# Altium PCB 调制板PCB.PcbDoc
Units mil, origin at the board's own origin, x right, y up, seen from the top; angles counter-clockwise.
Board outline 6000 x 4000 mil, 2 copper layers (Top Layer, Bottom Layer); 32 components, 31 nets, 166 pads, 16 vias.
Unrouted connection lines stored in the file: 2.
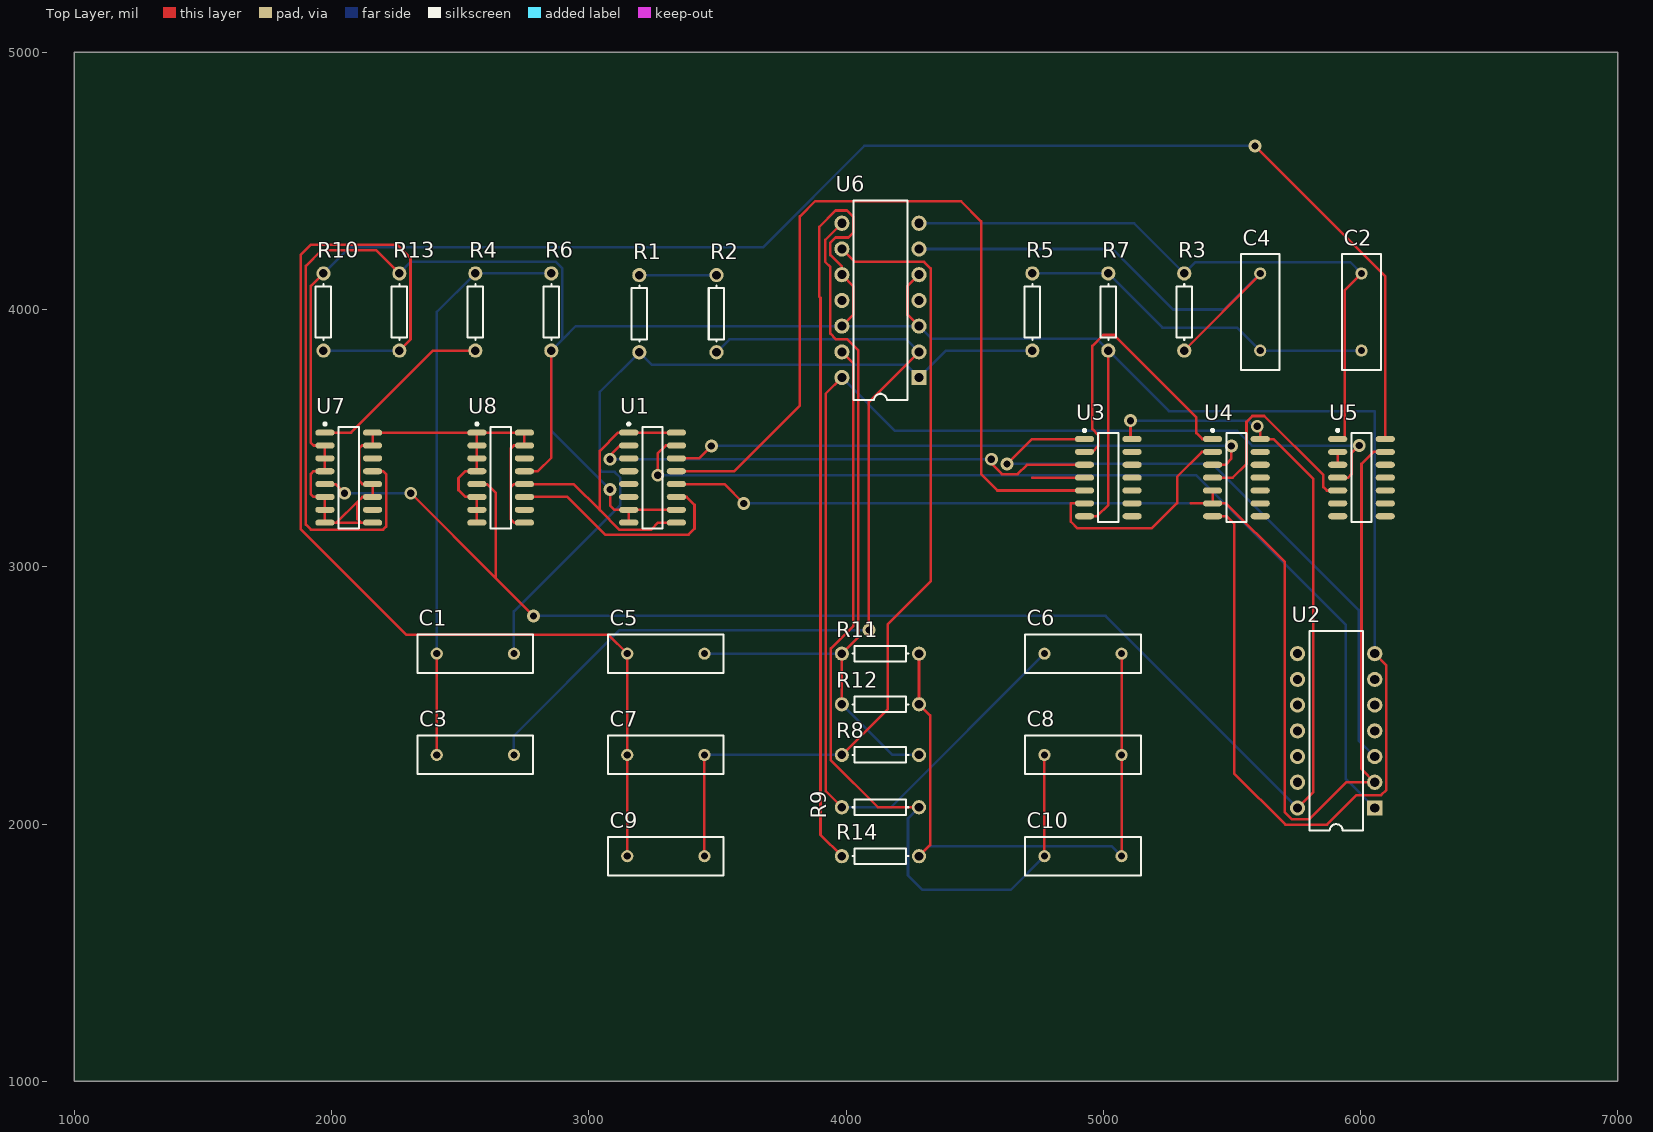
[diagram p0: Top Layer view]
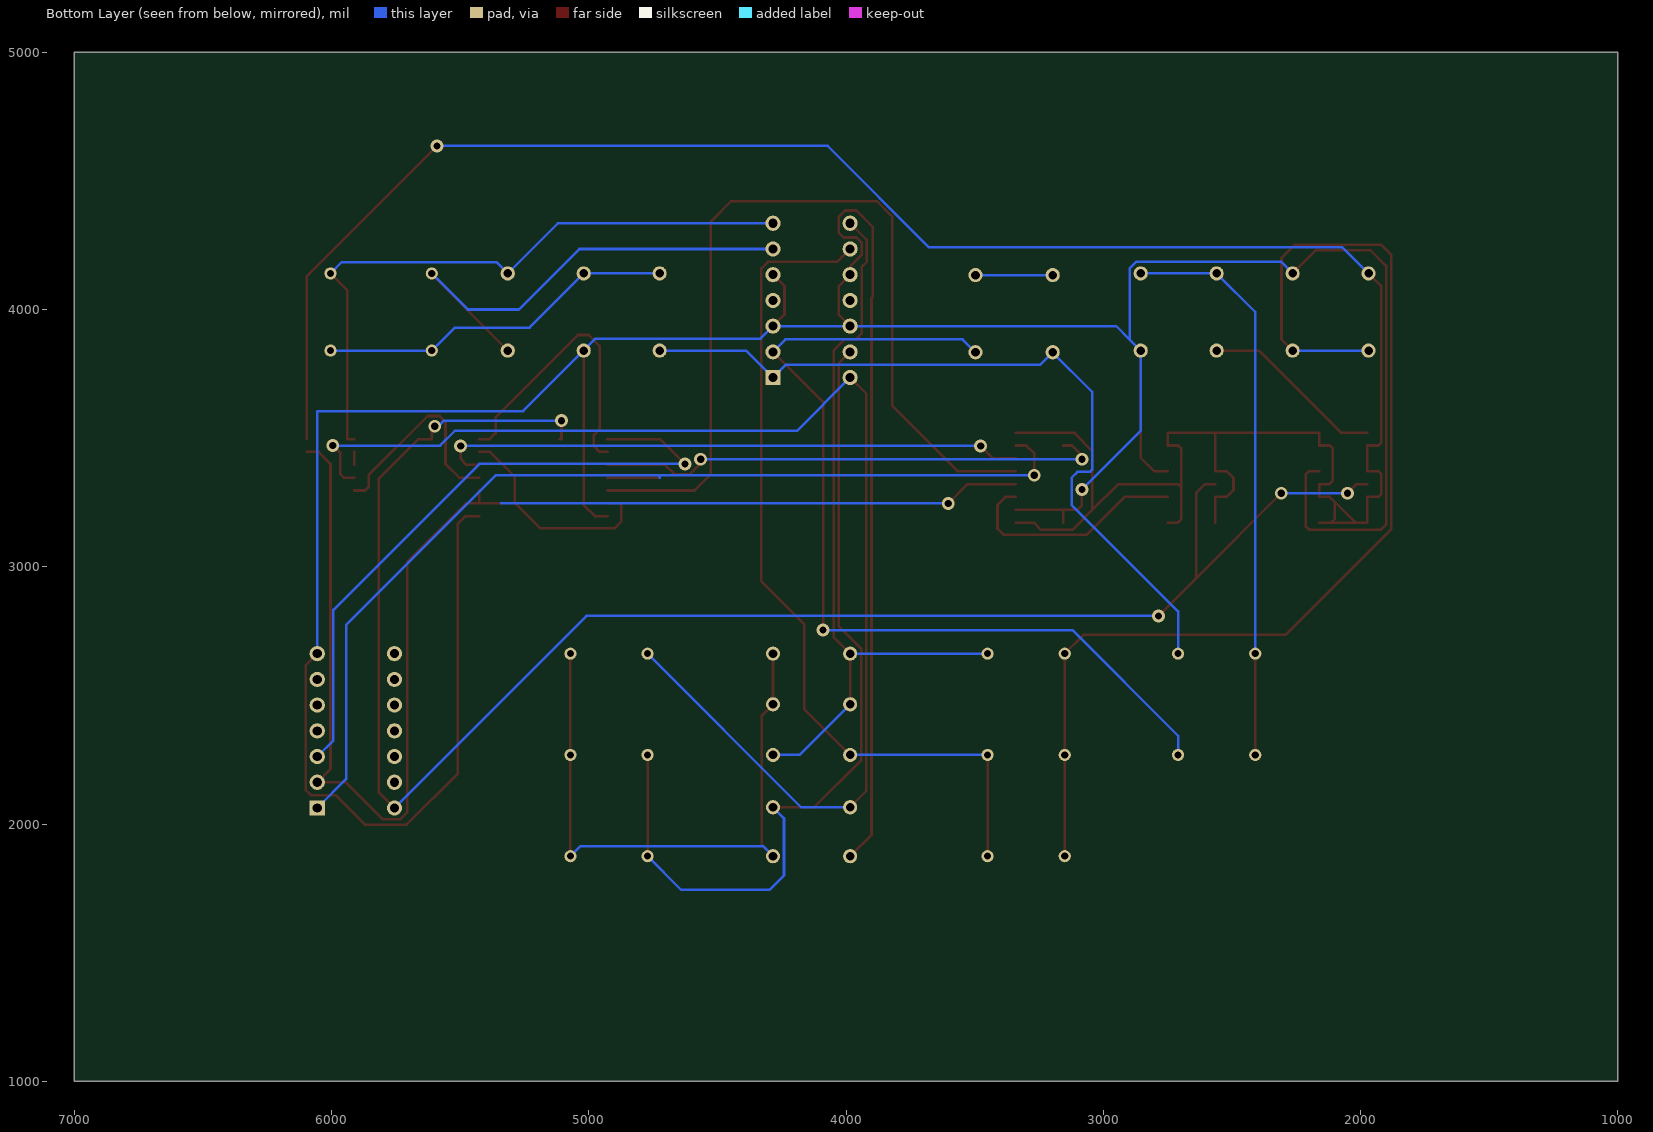
[diagram p1: Bottom Layer view, seen from below]

## Layer stack, top to bottom
Top Solder: solder mask 0.4, Solder Resist, Dk 3.5
Top Layer: signal copper 1.4
Dielectric 1: dielectric 12.6, FR-4, Dk 4.8
Bottom Layer: signal copper 1.4
Bottom Solder: solder mask 0.4, Solder Resist, Dk 3.5

## Board outline
1000,1000 7000,1000 7000,5000 1000,5000

## Design rules (kind name [scope] priority, off if disabled: settings)
Clearance [All] p1: gap=10 ignorepadtopadclearanceinfootprint=FALSE except(0: Arc-Hole Track-Hole SMDPad-Hole THPad-Hole Via-Hole Fill-Hole Poly-Hole Region-Hole Text-Hole)
PolygonConnect [All] p1: connectstyle=Relief reliefconductorwidth=10 reliefentries=4 polygonreliefangle="90 Angle" airgapwidth=10
RoomDefinition 调制板 [InComponentClass('调制板原理图')] p1: confinementstyle=ConfineIn formatcopy=TRUE outline 901.38,5019.69 7086.61,5019.69 7086.61,984.25 901.38,984.25
RoutingVias [All] p1: holewidth=28 width=50 viastyle="Through Hole" minholewidth=28 minwidth=50 maxholewidth=28 maxwidth=50
SolderMaskExpansion [All] p1: expansion=4
Width [All] p1: maxlimit=10 minlimit=10 preferedwidth=10
30 further rules are at their usual default settings.

## Components (designator, comment, footprint, x,y, rotation, side; value= is the part's Value field where it differs from the comment)
C1 "Cap" RAD-0.3 2559.06,2662.21 r0 top value=100pF
C2 "Cap" RAD-0.3 6003.94,3990.39 r90 top value=100pF
C3 "Cap" RAD-0.3 2559.06,2268.51 r0 top value=100pF
C4 "Cap" RAD-0.3 5610.24,3990.39 r90 top value=100pF
C5 "Cap" RAD-0.3 3299.61,2662.21 r0 top value=150p
C6 "Cap" RAD-0.3 4921.26,2662.21 r180 top value=150p
C7 "Cap" RAD-0.3 3299.61,2268.51 r0 top value=20p
C8 "Cap" RAD-0.3 4921.26,2268.51 r180 top value=100pF
C9 "Cap" RAD-0.3 3299.61,1874.81 r0 top value=100pF
C10 "Cap" RAD-0.3 4921.26,1874.81 r180 top value=100pF
R1 "Res1" AXIAL-0.3 3196.46,3983.86 r270 top value=100k
R2 "Res1" AXIAL-0.3 3496.46,3983.86 r90 top value=15k
R3 "Res1" AXIAL-0.3 5314.96,3990.39 r90 top value=91k
R4 "Res1" AXIAL-0.3 2559.06,3990.39 r90 top value=15k
R5 "Res1" AXIAL-0.3 4724.41,3990.39 r90 top value=47k
R6 "Res1" AXIAL-0.3 2854.33,3990.39 r90 top value=1.5k
R7 "Res1" AXIAL-0.3 5019.69,3990.39 r90 top value=1.2k
R8 "Res1" AXIAL-0.3 4133.86,2268.51 r0 top value=120k
R9 "Res1" AXIAL-0.3 4133.86,2065.12 r180 top value=82k
R10 "Res1" AXIAL-0.3 1968.5,3990.39 r270 top value=12k
R11 "Res1" AXIAL-0.3 4133.86,2662.21 r0 top value=100k
R12 "Res1" AXIAL-0.3 4133.86,2465.36 r0 top value=100k
R13 "Res1" AXIAL-0.3 2263.78,3990.39 r270 top value=5.1k
R14 "Res1" AXIAL-0.3 4133.86,1874.81 r0 top value=3k
U1 "SN74LS194AD" D016_L 3248.03,3346.46 r0 top
U2 "SN74LS86AN" N014 5905.51,2362.21 r90 top
U3 "SN74LS32D" D014_L 5019.69,3346.46 r0 top
U4 "SN74LS02D" D014_L 5517.72,3346.46 r0 top
U5 "TLC4066ID" D014_L 6003.94,3346.46 r0 top
U6 "TL084N" N014 4133.86,4035.43 r90 top
U7 "SN74LS76AD" D016_L 2066.93,3346.46 r0 top
U8 "SN74LS76AD" D016_L 2657.48,3346.46 r0 top

## Footprints (in the part's own frame and the unit in brackets; to place one, negate y for a bottom-side part, rotate by r counter-clockwise, add the part's x,y. Pads: shape width x height; smd on the part's side, far side on the other; paste and mask are expansions set on the pad)
AXIAL-0.3 [mm] "Axial Device, Thru-Hole; 2 Leads; 0.3 in Pin Spacing"
  round 1.4 hole 0.85: 1(-3.81,0) 2(3.81,0)
  silkscreen extent -2.77,-0.76 2.77,0.76
D014_L [mm] "SOIC, 14-Leads, Body 8.7x3.9mm, Pitch 1.27mm, IPC High Density"
  oval 1.9x0.6 smd: 1(-2.35,3.81) 2(-2.35,2.54) 3(-2.35,1.27) 4(-2.35,0) 5(-2.35,-1.27) 6(-2.35,-2.54) 7(-2.35,-3.81) 8(2.35,-3.81) 9(2.35,-2.54) 10(2.35,-1.27) 11(2.35,0) 12(2.35,1.27) 13(2.35,2.54) 14(2.35,3.81)
  silkscreen extent -2.47,-4.4 1,4.78, body extent -1.95,-4.33 1.95,4.33, height 1.75
D016_L [mm] "SOIC, 16-Leads, Body 9.9x3.9mm, Pitch 1.27mm, IPC High Density"
  oval 1.9x0.6 smd: 1(-2.35,4.445) 2(-2.35,3.175) 3(-2.35,1.905) 4(-2.35,0.635) 5(-2.35,-0.635) 6(-2.35,-1.905) 7(-2.35,-3.175) 8(-2.35,-4.445) 9(2.35,-4.445) 10(2.35,-3.175) 11(2.35,-1.905) 12(2.35,-0.635) 13(2.35,0.635) 14(2.35,1.905) 15(2.35,3.175) 16(2.35,4.445)
  silkscreen extent -2.47,-5 1,5.42, body extent -1.95,-4.95 1.95,4.95, height 1.75
N014 [mm] "DIP; 14 Leads; Row Spacing 7.62 mm; Pitch 2.54 mm"
  rect 1.5x1.5 hole 0.9: 1(-7.62,-3.81)
  round 1.5 hole 0.9: 2(-5.08,-3.81) 3(-2.54,-3.81) 4(0,-3.81) 5(2.54,-3.81) 6(5.08,-3.81) 7(7.62,-3.81) 8(7.62,3.81) 9(5.08,3.81) 10(2.54,3.81) 11(0,3.81) 12(-2.54,3.81) 13(-5.08,3.81) 14(-7.62,3.81)
  silkscreen extent -9.85,-2.65 9.85,2.65
RAD-0.3 [mm] "Radial Cap, Thru-Hole; 2 Leads; 0.3 in Pin Spacing"
  round 1.2 hole 0.7: 1(-3.81,0) 2(3.81,0)
  silkscreen extent -5.71,-1.9 5.72,1.91

## Part data
C1 C2 C3 C4 C5 C6 C7 C8 C9 C10: "Capacitor", LatestRevisionDate=17-Jul-2002, LatestRevisionNote="Re-released for DXP Platform.", PackageDescription="Radial Cap, Thru-Hole; 2 Leads; 0.3 in Pin Spacing", PackageReference=RAD-0.3, Published=8-Jun-2000, Publisher="Altium Limited"
R1 R2 R3 R4 R5 R6 R7 R8 R9 R10 R11 R12 R13 R14: "Resistor", LatestRevisionDate=17-Jul-2002, LatestRevisionNote="Re-released for DXP Platform.", PackageDescription="Axial Device, Thru-Hole; 2 Leads; 0.3 in Pin Spacing", PackageReference=AXIAL-0.3, Published=8-Jun-2000, Publisher="Altium Limited"
U1: "4-Bit Bidirectional Universal Shift Register", Code_IPC=SOIC127P600-16, ComponentLink1Description="Manufacturer Link", ComponentLink1URL=http://www.ti.com/, ComponentLink2Description=Datasheet, ComponentLink2URL=http://www-s.ti.com/sc/ds/sn74ls194a.pdf, DatasheetVersion=Mar-1988, LatestRevisionDate=13-Apr-2006, LatestRevisionNote="IPC-7351 Footprint Added.", PackageDescription="16-Pin Small Outline Integrated Circuit 1.27 mm Pitch", PackageReference=D016, PackageVersion=Jan-1998, Published=8-Jun-2000, Publisher="Altium Limited"
U2: "Quadruple 2-Input Exclusive-OR Gate", ComponentLink1Description="Manufacturer Link", ComponentLink1URL=http://www.ti.com/, ComponentLink2Description=Datasheet, ComponentLink2URL=http://www-s.ti.com/sc/ds/sn74ls86a.pdf, DatasheetVersion=Mar-1988, LatestRevisionDate=04-Mar-2005, LatestRevisionNote="Stylized 3D Model Added.", PackageDescription="DIP; 14 Leads; Row Spacing 7.62 mm; Pitch 2.54 mm", PackageReference=N014, PackageVersion=Oct-1995, Published=8-Jun-2000, Publisher="Altium Limited"
U3: "Quadruple 2-Input Positive-OR Gate", Code_IPC=SOIC127P600-14, ComponentLink1Description="Manufacturer Link", ComponentLink1URL=http://www.ti.com/, ComponentLink2Description=Datasheet, ComponentLink2URL=http://www-s.ti.com/sc/ds/sn74ls32.pdf, DatasheetVersion=Mar-1988, LatestRevisionDate=13-Apr-2006, LatestRevisionNote="IPC-7351 Footprint Added.", PackageDescription="14-Pin Small Outline Integrated Circuit 1.27 mm Pitch", PackageReference=D014, PackageVersion=Jan-1998, Published=8-Jun-2000, Publisher="Altium Limited"
U4: "Quadruple 2-Input Positive-NOR Gate", Code_IPC=SOIC127P600-14, ComponentLink1Description="Manufacturer Link", ComponentLink1URL=http://www.ti.com/, ComponentLink2Description=Datasheet, ComponentLink2URL=http://www-s.ti.com/sc/ds/sn54s02.pdf, DatasheetVersion=Mar-1988, LatestRevisionDate=13-Apr-2006, LatestRevisionNote="IPC-7351 Footprint Added.", PackageDescription="14-Pin Small Outline Integrated Circuit 1.27 mm Pitch", PackageReference=D014, PackageVersion=Jan-1998, Published=8-Jun-2000, Publisher="Altium Limited"
U5: "Quadruple Bilateral Analog Switch", Code_IPC=SOIC127P600-14, ComponentLink1Description="Manufacturer Link", ComponentLink1URL=http://www.ti.com/, DatasheetVersion=Jan-1986, LatestRevisionDate=13-Apr-2006, LatestRevisionNote="IPC-7351 Footprint Added.", PackageDescription="14-Pin Small Outline Integrated Circuit 1.27 mm Pitch", PackageReference=D014, PackageVersion=Jan-1998, Published=8-Jun-2000, Publisher="Altium Limited"
U6: "JFET-Input Operational Amplifier", ComponentLink1Description="Manufacturer Link", ComponentLink1URL=http://www.ti.com/, ComponentLink2Description=Datasheet, ComponentLink2URL=http://www-s.ti.com/sc/ds/tl084.pdf, DatasheetVersion=Feb-1999, LatestRevisionDate=04-Mar-2005, LatestRevisionNote="Stylized 3D Model Added.", PackageDescription="DIP; 14 Leads; Row Spacing 7.62 mm; Pitch 2.54 mm", PackageReference=N014, PackageVersion=Oct-1995, Published=16-Jan-2001, Publisher="Altium Limited"
U7 U8: "Dual J-K Flip-Flop with Preset and Clear", Code_IPC=SOIC127P600-16, ComponentAvailability=Obsolete, ComponentLink1Description="Manufacturer Link", ComponentLink1URL=http://www.ti.com/, ComponentLink2Description=Datasheet, ComponentLink2URL=http://www-s.ti.com/sc/ds/sn74ls76a.pdf, DatasheetVersion=Mar-1988, LatestRevisionDate=13-Apr-2006, LatestRevisionNote="IPC-7351 Footprint Added.", PackageDescription="16-Pin Small Outline Integrated Circuit 1.27 mm Pitch", PackageReference=D016, PackageVersion=Jan-1998, Published=8-Jun-2000, Publisher="Altium Limited"

## Via types
v1: diameter 50, hole 28, Top Layer to Bottom Layer, 16 vias

## Nets (pads, with @x,y where several pads share a name; then routed paths per layer and width w, separated by ;. In a path a pad name is that pad's centre, name@x,y a point inside that pad or via, vN(x,y) a via of type N, cw(c..) or ccw(c..) an arc to the next point about the centre after c; other vN are vias at no path point)
+5: R10.1 U1.1 U1.9 U1.16 U5.14 U7.2 U7.3 U7.4 U7.6 U7.7 U7.8 U7.9 U7.11 U7.12 U7.15 U7.16 U8.1 U8.2 U8.3 U8.4 U8.6 U8.7 U8.8 U8.9 U8.12 U8.15 U8.16 | length 9887.2
  Top Layer w10: R10.1 1920,4091.89 1920,3481.46 1930,3471.46 U7.2 U7.3 U7.4 1930,3371.46 1920,3361.46 1920,3281.46 1930,3271.46 U7.6 U7.7 U7.8 2020,3171.46 ; U7.9 2114,3171.46 ; U8.8 U8.7 U8.6 2520,3271.46 2493.54,3297.92 2493.54,3345 2520,3371.46 U8.4 U8.3 U8.2 U8.1 ; U8.9 2710,3171.46 2697,3184.46 2697,3310 ; U1.9 3270,3171.46 3243.19,3144.65 3118.35,3144.65 3043,3220 ; U1.16 U1.1 3114.46,3521.46 3043,3450 3043,3220 ; v1(5590,4636) 6096,4130 6096,3496.46 U5.14 ; 2020,3171.46 2114,3171.46 ; 2020,3171.46 2100,3251.46 ; 2100,3251.46 2100,3185.46 2114,3171.46 ; 2100,3251.46 2120,3271.46 U7.11 U7.12 2120,3321.46 2107,3334.46 2107,3460 2118.46,3471.46 U7.15 U7.16 U8.1 ; U8.1 U8.16 U8.15 2708.46,3471.46 2697,3460 2697,3310 ; 2697,3310 2708.46,3321.46 U8.12 2941.54,3321.46 3043,3220
  Bottom Layer w10: R10.1 2070.11,4242 3677,4242 4071,4636 v1(5590,4636)
+12: U6.11
-5: U5.7
-12: U6.4
GND: R6.1 R7.1 R13.1 R14.1 U1.7 U1.8 U1.10 U2.7 U3.7 U4.7 U6.3 U6.5 U6.10 U6.12 U7.13 U8.13 | length 15324.1
  Top Layer w10: U7.13 2200.54,3371.46 2212,3360 2212,3156 2200,3144 1920,3144 1900,3164 1900,4170 1960,4230 2174.18,4230 R13.1 ; U8.13 2802,3371.46 2854.33,3423.79 R6.1 ; v1(3083,3300) 3083,3238.46 3100,3221.46 U1.7 ; U1.8 U1.7 ; U1.10 U1.7 ; R14.1 3901,1957.67 3901,4045 3896,4050 3896,4321 3960,4385 4004,4385 4029,4360 4029,4300 4009,4280 3959.33,4280 3939.33,4260 3939.33,4211.67 3983.86,4167.14 U6.10 4029,4090.29 4029,3980.58 U6.12 ; U6.3 4239,3980.29 4239,4090.58 U6.5 ; U3.7 4976.14,3196.46 5019.69,3240 R7.1 ; U4.7 5480,3196.46 5509,3167.46 5509,2196.84 5708.16,1997.68 5870.68,1997.68 5985,2112 6080,2112 6101,2133 6101,2616.72 U2.7
  Bottom Layer w10: R13.1 2309.39,4186 2871,4186 2897,4160 2897,3883.06 ; v1(3083,3300) 2854.33,3528.67 R6.1 2897,3883.06 ; U2.7 6055.51,3604.49 6055,3605 5255.08,3605 R7.1 4973.08,3887 4332.29,3887 U6.3 U6.12 2949.37,3935.43 2897,3883.06
NetC1_1: C1.1 C3.1 R4.2 R6.2 | length 2229.3
  Top Layer w10: C3.1 2409.06,2465 C1.1
  Bottom Layer w10: C1.1 2409.06,3990.4 R4.2 R6.2
NetC1_2: C1.2 R1.2 R5.1 U6.1 | length 3080.1
  Bottom Layer w10: C1.2 2709.06,2826.06 3123,3240 3123,3346 3100,3369 3052,3369 3043,3378 3043,3680.4 R1.2 3245.32,3785 4234.29,3785 U6.1 4388.82,3840.39 R5.1
NetC2_1: C2.1 C4.1 R5.2 R7.2 | length 1403.8
  Bottom Layer w10: R5.2 4872,4140.39 R7.2 5230.08,3930 5520.63,3930 C4.1 C2.1
NetC2_2: C2.2 R3.2 U5.1 U6.7 | length 2535.4
  Top Layer w10: U5.1 5939,3496.46 5939,4075.46 C2.2
  Bottom Layer w10: U6.7 5119.92,4335.43 R3.2 5358.57,4184 5960.33,4184 C2.2
NetC3_2: C3.2 R2.1 U6.2 | length 3615.1
  Top Layer w10: v1(4089,2754) 4089,3640.58 U6.2
  Bottom Layer w10: C3.2 2709.06,2343.06 3120,2754 v1(4089,2754) ; R2.1 3546.6,3884 4235.29,3884 U6.2
NetC4_2: C4.2 R3.1 U6.6 | length 1904.4
  Top Layer w10: R3.1 5610.24,4135.67 C4.2
  Bottom Layer w10: U6.6 5036.57,4235.43 5272,4000 5469.84,4000 C4.2
NetC5_1: C5.1 C7.1 C9.1 R10.2 R13.2 | length 4460.7
  Top Layer w10: R13.2 2307,3883.61 2307,4200 2255,4252 1920,4252 1880,4212 1880,3147 2292,2735 3076.82,2735 C5.1 3149.61,2465 C7.1 C9.1
  Bottom Layer w10: R10.2 2116,3840.39 R13.2
NetC5_2: C5.2 R8.2 R11.1 R12.1 U6.8 | length 2918.6
  Top Layer w10: R12.1 R11.1 4048.39,2726.73 4048.39,3840.61 4004,3885 3960,3885 3939,3906 3939,4165.25 3919.33,4184.92 3919.33,4270.91 U6.8
  Bottom Layer w10: C5.2 3716,2662.21 R11.1 ; R12.1 4180.71,2268.51 R8.2
NetC6_1: C6.1 C8.1 C10.1 R11.2 R12.2 R14.2 | length 2430.4
  Top Layer w10: R14.2 4327,1917.94 4327,2422.22 R12.2 R11.2 ; C10.1 5071.26,2071 C8.1 C6.1
  Bottom Layer w10: R14.2 4323.06,1914 5032.07,1914 C10.1
NetC6_2: C6.2 R9.2 U5.4 U6.14 | length 5060.7
  Top Layer w10: R9.2 3921.3,2127.68 3921.3,3672.88 U6.14 ; U5.4 5952.46,3346.46 5966,3360 5966,3442 v1(5995,3471)
  Bottom Layer w10: R9.2 4174.18,2065.12 C6.2 ; U6.14 4191.29,3528 5521,3528 5578,3471 v1(5995,3471)
NetC7_2: C7.2 C9.2 R8.1 U6.9 | length 3338.8
  Top Layer w10: C9.2 C7.2 ; R8.1 4162.82,2447.47 4162.82,2776.82 4329,2943 4329,4160 4304,4185 4034.29,4185 U6.9
  Bottom Layer w10: C7.2 3716,2268.51 R8.1
NetC8_2: C8.2 C10.2 R9.1 U6.13 | length 3344.7
  Top Layer w10: U6.13 4028.39,3790.91 4028.39,2769.39 3941.3,2682.3 3941.3,2247.7 4123.88,2065.12 R9.1 ; C10.2 4771.26,2071 C8.2
  Bottom Layer w10: R9.1 4241,2022.26 4241,1800 4297,1744 4640.46,1744 C10.2
NetR1_1: R1.1 R2.2 | length 300
  Bottom Layer w10: R1.1 R2.2
NetR4_1: R4.1 U7.1 | length 716.8
  Top Layer w10: U7.1 2076,3521.46 2394.94,3840.39 R4.1
NetU1_2: U1.2 U3.3 | length 1996.4
  Top Layer w10: v1(3083,3418) 3083,3432.46 3122,3471.46 U1.2 ; v1(4565,3418) 4565,3401 4606,3360 4667,3360 4703.46,3396.46 U3.3
  Bottom Layer w10: v1(3083,3418) v1(4565,3418)
NetU1_11: U1.11 U8.11 | length 907.2
  Top Layer w10: U8.11 2917,3271.46 3063.81,3124.65 3387.65,3124.65 3411,3148 3411,3240.46 3380,3271.46 U1.11
NetU1_12: U1.12 U2.2 U4.5 U4.6 U5.13 | length 5305.9
  Top Layer w10: U1.12 3527.54,3321.46 v1(3602.54,3246.46) ; 5339.46,3246.46 U4.6 ; U4.5 U4.6 ; U5.13 6050.46,3446.46 6004,3400 6004,2213.72 U2.2 5944.53,2162.21 5800,2017.68 5733.3,2017.68 5705.84,2045.14 5705.84,3018.62 5478,3246.46 U4.6
  Bottom Layer w10: v1(3602.54,3246.46) 5339.46,3246.46
NetU1_13: U1.13 U3.5 | length 3493.8
  Top Layer w10: U1.13 3566,3371.46 3821,3626.46 3821,4362 3880,4421 4447,4421 4525,4343 4525,3360 4588.54,3296.46 U3.5
NetU1_14: U1.14 U4.3 | length 2310.1
  Top Layer w10: U1.14 3428,3421.46 v1(3476.54,3470) ; U4.3 5474.46,3396.46 5498,3420 v1(5498,3470)
  Bottom Layer w10: v1(3476.54,3470) v1(5498,3470)
NetU1_15: U1.15 U2.1 U3.4 | length 4056
  Top Layer w10: v1(3268,3356) 3268,3440 3299.46,3471.46 U1.15 ; 4724.81,3346.46 U3.4
  Bottom Layer w10: v1(3268,3356) 4724.81,3356 ; 4724.81,3346.46 4724.81,3356 ; U2.1 5943,2174.72 5943,2774.13 5361.13,3356 4724.81,3356
NetU2_3: U2.3 U3.1 | length 2539.1
  Top Layer w10: v1(4626,3400) 4722.46,3496.46 U3.1
  Bottom Layer w10: v1(4626,3400) 5425,3400 5993,2832 5993,2324.72 U2.3
NetU3_2: U3.2 U4.1 | length 1149.2
  Top Layer w10: U3.2 4957.46,3446.46 4980,3469 4980,3513 4958,3535 4958,3859 5000,3901 5042,3901 5362,3581 5362,3520 5385.54,3496.46 U4.1
NetU3_6: U3.6 U4.2 | length 869.5
  Top Layer w10: U3.6 4874,3246.46 4874,3175 4900,3149 5188,3149 5287,3248 5287,3350 5383.46,3446.46 U4.2
NetU4_4: U4.4 U5.5 | length 827.9
  Top Layer w10: U4.4 5503.46,3346.46 5557,3400 5557,3563.1 5580,3586.1 5625.9,3586.1 5856,3356 5856,3310 5869.54,3296.46 U5.5
NetU5_2: U5.2 U5.3 | length 50
  Top Layer w10: U5.3 U5.2
VCC: U2.14 U3.14 U4.14 U7.5 U8.5 | length 6932.2
  Top Layer w10: U7.5 2014.54,3321.46 v1(2050,3286) ; v1(2308,3286) 2639,2955 ; U8.5 2603.54,3321.46 2639,3286 2639,2955 ; v1(2785,2809) 2639,2955 ; v1(5106,3568) 5106,3496.46 U3.14 ; v1(5599,3546) 5611,3534 U4.14@5611,3496.46 ; U4.14 U4.14@5611,3496.46 ; U2.14 5817,2123.7 5817,3341 5661.54,3496.46 U4.14@5611,3496.46
  Bottom Layer w10: v1(2050,3286) v1(2308,3286) ; v1(2785,2809) 5008.72,2809 U2.14 ; v1(5106,3568) 5562,3568 5584,3546 v1(5599,3546)
pads on no net: U1.3 U1.4 U1.5 U1.6 U2.4 U2.5 U2.6 U2.8 U2.9 U2.10 U2.11 U2.12 U2.13 U3.8 U3.9 U3.10 U3.11 U3.12 U3.13 U4.8 U4.9 U4.10 U4.11 U4.12 U4.13 U5.6 U5.8 U5.9 U5.10 U5.11 U5.12 U7.10 U7.14 U8.10 U8.14